# Altium PCB Near-E-Field-Probe.PcbDoc
Units mm, origin at the board's own origin, x right, y up, seen from the top; angles counter-clockwise.
Board outline 100.41 x 13.97 mm, 2 copper layers (Top Layer, Bottom Layer), stack 1.135 mm thick; 1 components, 2 nets, 5 pads, 216 vias.
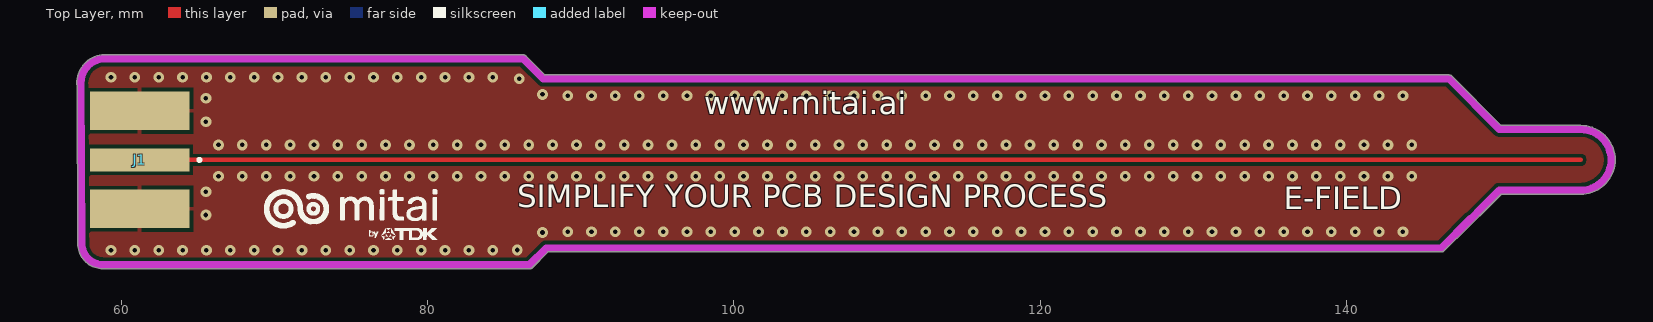
[diagram p0: Top Layer view]
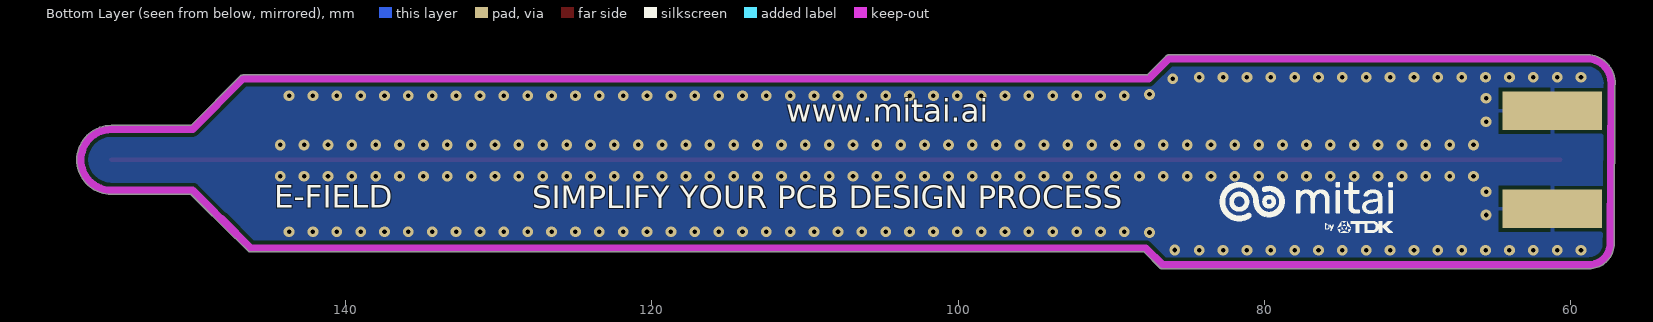
[diagram p1: Bottom Layer view, seen from below]

## Layer stack, top to bottom
Top Solder: solder mask 0.0127, Solder Resist, Dk 3.5
Top Layer: signal copper 0.035
Dielectric 1: dielectric 1.065, FR-4, Dk 4.8
Bottom Layer: signal copper 0.035
Bottom Solder: solder mask 0.0127, Solder Resist, Dk 3.5

## Board outline
58.945,62.533 68.694,62.526 86.652,62.526 ccw(c86.652,62.776) 86.829,62.599 87.861,63.631 146.177,63.631 ccw(c146.177,63.881) 146.354,63.704 147.098,64.448 147.195,64.509 150.081,67.394 155.23,67.394 155.272,67.391 ccw(c155.272,69.641) 157.522,69.641 ccw(c155.272,69.641) 155.274,71.892 155.272,71.892 150.078,71.892 146.862,75.108 146.862,75.107 ccw(c146.685,74.93) 146.685,75.181 87.687,75.181 87.664,75.18 86.422,76.422 ccw(c86.245,76.245) 86.245,76.495 58.767,76.495 58.737,76.493 ccw(c58.957,74.657) 57.119,74.451 57.17,64.307 57.17,64.181 ccw(c58.818,64.181)

## Design rules (kind name [scope] priority, off if disabled: settings)
Clearance [All] p1: gap=0.254 ignorepadtopadclearanceinfootprint=FALSE except(0: Arc-Hole Track-Hole SMDPad-Hole THPad-Hole Via-Hole Fill-Hole Poly-Hole Region-Hole Text-Hole)
PlaneConnect [All] p1: planeconnectstyle=Direct reliefexpansion=0.508 reliefentries=4 reliefconductorwidth=0.254 reliefairgap=0.254
PolygonConnect [All] p1: thpad.connectstyle=Direct thpad.reliefconductorwidth=0.254 thpad.reliefentries=4 thpad.polygonreliefangle="90 Angle" thpad.airgapwidth=0.254 smdpad.connectstyle=Relief smdpad.reliefconductorwidth=0.254 smdpad.reliefentries=4 smdpad.polygonreliefangle="90 Angle" smdpad.airgapwidth=0.254 via.connectstyle=Direct via.reliefconductorwidth=0.254 via.reliefentries=4 via.polygonreliefangle="90 Angle" via.airgapwidth=0.254
RoutingVias [All] p1: holewidth=0.3 width=0.7 viastyle="Through Hole" minholewidth=0.3 minwidth=0.7 maxholewidth=0.3 maxwidth=0.7
SolderMaskExpansion [All] p1: expansion=0.102 istentingtop=FALSE
Width [All] p1: maxlimit=0.5 minlimit=0.2 preferedwidth=0.3 minimp=50.000000 maximp=50.000000 favimp=50.000000
29 further rules are at their usual default settings.

## Components (designator, comment, footprint, x,y, rotation, side; value= is the part's Value field where it differs from the comment)
J1 "CON-SMA-EDGE-S" RFSOLUTIONS_CON-SMA-EDGE-S 62.706,69.641 r0 top

## Footprints (in the part's own frame and the unit in brackets; to place one, negate y for a bottom-side part, rotate by r counter-clockwise, add the part's x,y. Pads: shape width x height; smd on the part's side, far side on the other; paste and mask are expansions set on the pad)
RFSOLUTIONS_CON-SMA-EDGE-S [mm]
  rect 6.5x1.5 smd: 1(-1.5,0)
  rect 6.5x2.5 smd: G1(-1.5,3.2) G2(-1.5,-3.2)
  rect 6.5x2.5 smd far side: G3(-1.5,3.2) G4(-1.5,-3.2)
  silkscreen extent 2.3,-0.1 2.5,0.1, body extent -11.27,-3.17 2.06,3.17, height 3.55

## Part data
J1: "SMA Connector Jack, Female Socket - Board Edge, End Launch Solder", Package=None, Check_prices=https://www.snapeda.com/parts/CON-SMA-EDGE-S/RF+Solutions/view-part/?ref=eda, Digi-Key_Part_Number=CON-SMA-EDGE-S-ND, MF="RF Solutions", MP=CON-SMA-EDGE-S, Purchase-URL=https://pricing.snapeda.com/search/part/CON-SMA-EDGE-S/?ref=eda, SnapEDA_Link=https://www.snapeda.com/parts/CON-SMA-EDGE-S/RF+Solutions/view-part/?ref=snap

## Via types
v1: diameter 0.7, hole 0.3, Top Layer to Bottom Layer, tented both sides, 216 vias

## Nets (pads, with @x,y where several pads share a name; then routed paths per layer and width w, separated by ;. In a path a pad name is that pad's centre, name@x,y a point inside that pad or via, vN(x,y) a via of type N, cw(c..) or ccw(c..) an arc to the next point about the centre after c; other vN are vias at no path point)
GND: J1.G1 J1.G2 J1.G3 J1.G4
  other v1: 59.334,63.748 60.892,63.748 62.45,63.748 64.008,63.748 65.566,63.748 67.124,63.748 68.682,63.748 70.239,63.748 71.797,63.748 73.355,63.748 74.913,63.748 76.471,63.748 78.029,63.748 79.587,63.748 81.144,63.748 82.702,63.748 84.26,63.748 85.852,63.754 87.503,64.897 89.145,64.942 90.703,64.942 92.261,64.942 93.819,64.942 95.377,64.942 96.935,64.942 98.493,64.942 100.05,64.942 101.608,64.942 103.166,64.942 104.724,64.942 106.282,64.942 107.84,64.942 109.398,64.942 110.956,64.942 112.513,64.942 114.071,64.942 115.629,64.942 117.187,64.942 118.745,64.942 120.303,64.942 121.861,64.942 123.418,64.942 124.976,64.942 126.534,64.942 128.092,64.942 129.65,64.942 131.208,64.942 132.766,64.942 134.323,64.942 135.881,64.942 137.439,64.942 138.997,64.942 140.555,64.942 142.113,64.942 143.671,64.942 65.532,66.04 65.532,67.564 66.353,68.574 67.911,68.574 69.469,68.574 71.027,68.574 72.585,68.574 74.143,68.574 75.7,68.574 77.258,68.574 78.816,68.574 80.374,68.574 81.932,68.574 83.49,68.574 85.048,68.574 86.605,68.574 88.163,68.574 89.721,68.574 91.279,68.574 92.837,68.574 94.395,68.574 95.953,68.574 97.51,68.574 99.068,68.574 100.626,68.574 102.184,68.574 103.742,68.574 105.3,68.574 106.858,68.574 108.416,68.574 109.973,68.574 111.531,68.574 113.089,68.574 114.647,68.574 116.205,68.574 117.763,68.574 119.321,68.574 120.878,68.574 122.436,68.574 123.994,68.574 125.552,68.574 127.11,68.574 128.668,68.574 130.226,68.574 131.783,68.574 133.341,68.574 134.899,68.574 136.457,68.574 138.015,68.574 139.573,68.574 141.131,68.574 142.689,68.574 144.246,68.574 66.353,70.618 67.911,70.618 69.469,70.618 71.027,70.618 72.585,70.618 74.143,70.618 75.7,70.618 77.258,70.618 78.816,70.618 80.374,70.618 81.932,70.618 83.49,70.618 85.048,70.618 86.605,70.618 88.163,70.618 89.721,70.618 91.279,70.618 92.837,70.618 94.395,70.618 95.953,70.618 97.51,70.618 99.068,70.618 100.626,70.618 102.184,70.618 103.742,70.618 105.3,70.618 106.858,70.618 108.416,70.618 109.973,70.618 111.531,70.618 113.089,70.618 114.647,70.618 116.205,70.618 117.763,70.618 119.321,70.618 120.878,70.618 122.436,70.618 123.994,70.618 125.552,70.618 127.11,70.618 128.668,70.618 130.226,70.618 131.783,70.618 133.341,70.618 134.899,70.618 136.457,70.618 138.015,70.618 139.573,70.618 141.131,70.618 142.689,70.618 144.246,70.618 65.532,72.136 65.532,73.66 89.145,73.832 90.703,73.832 92.261,73.832 93.819,73.832 95.377,73.832 96.935,73.832 98.493,73.832 100.05,73.832 101.608,73.832 103.166,73.832 104.724,73.832 106.282,73.832 107.84,73.832 109.398,73.832 110.956,73.832 112.513,73.832 114.071,73.832 115.629,73.832 117.187,73.832 118.745,73.832 120.303,73.832 121.861,73.832 123.418,73.832 124.976,73.832 126.534,73.832 128.092,73.832 129.65,73.832 131.208,73.832 132.766,73.832 134.323,73.832 135.881,73.832 137.439,73.832 138.997,73.832 140.555,73.832 142.113,73.832 143.671,73.832 87.503,73.914 85.979,74.93 59.334,75.026 60.892,75.026 62.45,75.026 64.008,75.026 65.566,75.026 67.124,75.026 68.682,75.026 70.239,75.026 71.797,75.026 73.355,75.026 74.913,75.026 76.471,75.026 78.029,75.026 79.587,75.026 81.144,75.026 82.702,75.026 84.26,75.026
PROBE: J1.1 | length 94.6
  Top Layer w0.293: J1.1@60.706,69.641 147.685,69.641 155.272,69.641

## Polygon pours and split planes (outlines as drawn)
GND on Bottom Layer "BOT_GND" (solid, pour order 1): 85.649,76.495 58.167,76.495 57.121,75.449 57.166,65.203 57.174,63.824 57.421,63.285 57.82,62.87 58.141,62.655 58.632,62.526 60.761,62.526 85.934,62.526 86.741,62.516 87.852,63.627 146.281,63.631 146.685,63.998 149.606,66.919 150.078,67.391 155.458,67.375 155.975,67.504 156.327,67.624 156.686,67.871 157.025,68.231 157.271,68.609 157.455,68.861 157.518,69.51 157.522,69.996 157.408,70.35 157.099,70.993 156.458,71.585 155.585,71.892 155.458,71.882 155.575,71.882 150.114,71.882 146.812,75.184 87.63,75.184 86.319,76.495
GND on Top Layer "TOP_GND" (solid, pour order 2): 58.945,62.533 68.694,62.526 86.652,62.526 ccw(c86.652,62.776) 86.829,62.599 87.861,63.631 146.177,63.631 ccw(c146.177,63.881) 146.354,63.704 147.098,64.448 147.195,64.509 150.081,67.394 155.23,67.394 155.272,67.391 ccw(c155.272,69.641) 157.522,69.641 ccw(c155.272,69.641) 155.274,71.892 155.272,71.892 150.078,71.892 146.862,75.108 146.862,75.107 ccw(c146.685,74.93) 146.685,75.181 87.687,75.181 87.664,75.18 86.422,76.422 ccw(c86.245,76.245) 86.245,76.495 58.767,76.495 58.737,76.493 ccw(c58.957,74.657) 57.119,74.451 57.17,64.307 57.17,64.181 ccw(c58.818,64.181)

## Keep-outs
Keep-Out Layer:
  lines w0.5: 57.421,64.181 ccw(c58.818,64.181) 58.818,62.784 ; 57.421,64.308 57.369,74.466 cw(c58.957,74.657) 58.767,76.245 86.245,76.245 87.56,74.93 ; 58.945,62.784 68.694,62.776 86.652,62.776 87.757,63.881 146.177,63.881 148.082,65.786 ; 87.687,74.93 146.685,74.93 149.974,71.641 155.272,71.641 cw(c155.272,69.641) 155.272,67.641 ; 147.018,64.686 149.974,67.641 ; 149.974,67.645 155.272,67.645

## Silkscreen, mask and mechanical layers (free items; w line width, h text height)
Top Overlay:
  drawing of 16 lines, arcs and shapes, not listed
  text "www.mitai.ai" at 98.065,72.136 h2.54
  text "SIMPLIFY YOUR PCB DESIGN PROCESS" at 85.852,66.072 h2.54
  text "E-FIELD" at 135.899,65.913 h2.54
Bottom Overlay:
  drawing of 16 lines, arcs and shapes, not listed
  text "www.mitai.ai" at 111.231,71.628 h2.54
  text "E-FIELD" at 144.644,66.04 h2.54
  text "SIMPLIFY YOUR PCB DESIGN PROCESS" at 127.81,65.986 h2.54